# Altium PCB Lights Board.PcbDoc
Units mil, origin at the board's own origin, x right, y up, seen from the top; angles counter-clockwise.
Board outline 2505.86 x 2897.16 mil, 2 copper layers (Top Layer, Bottom Layer); 49 components, 47 nets, 247 pads, 28 vias.
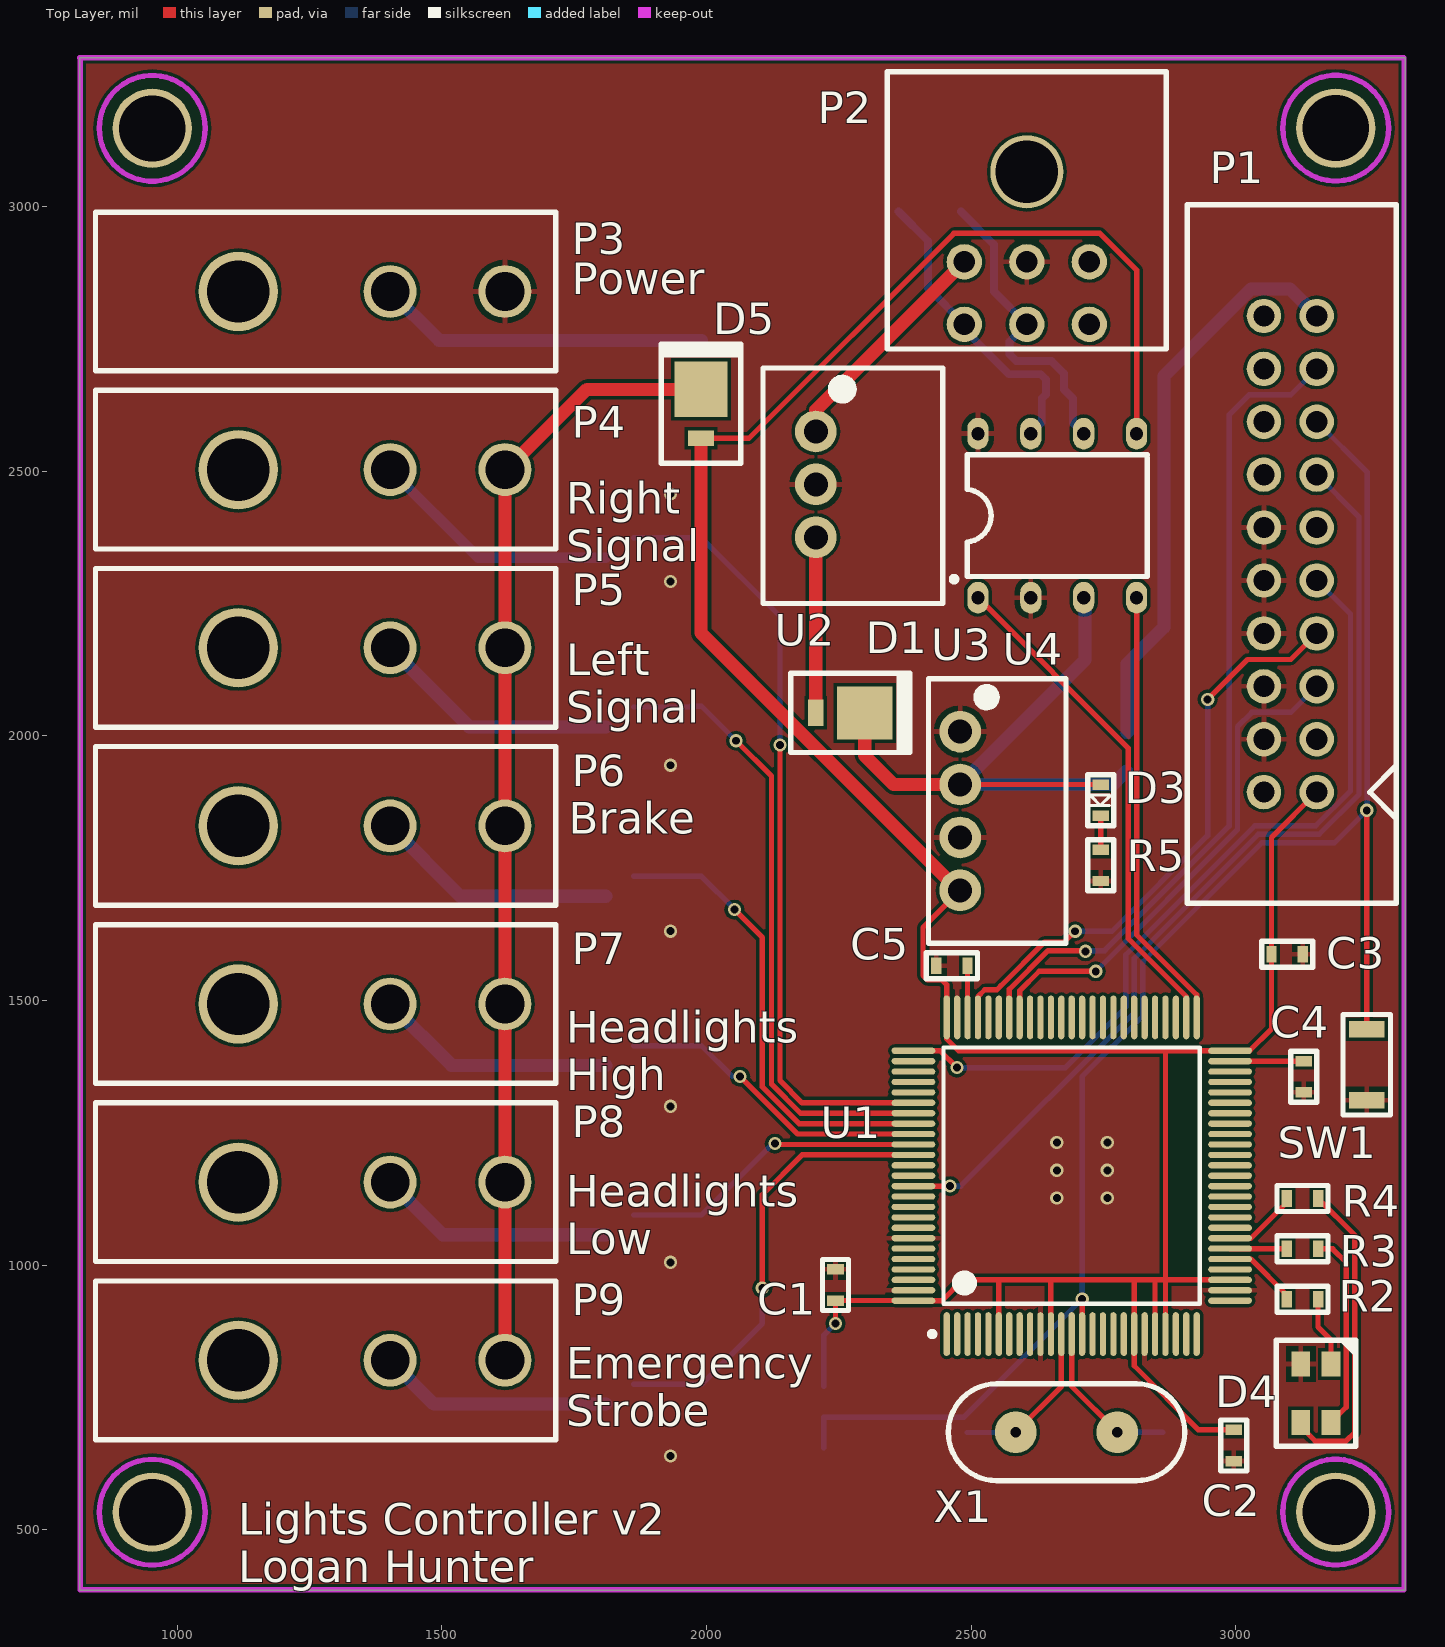
[diagram p0: Top Layer view]
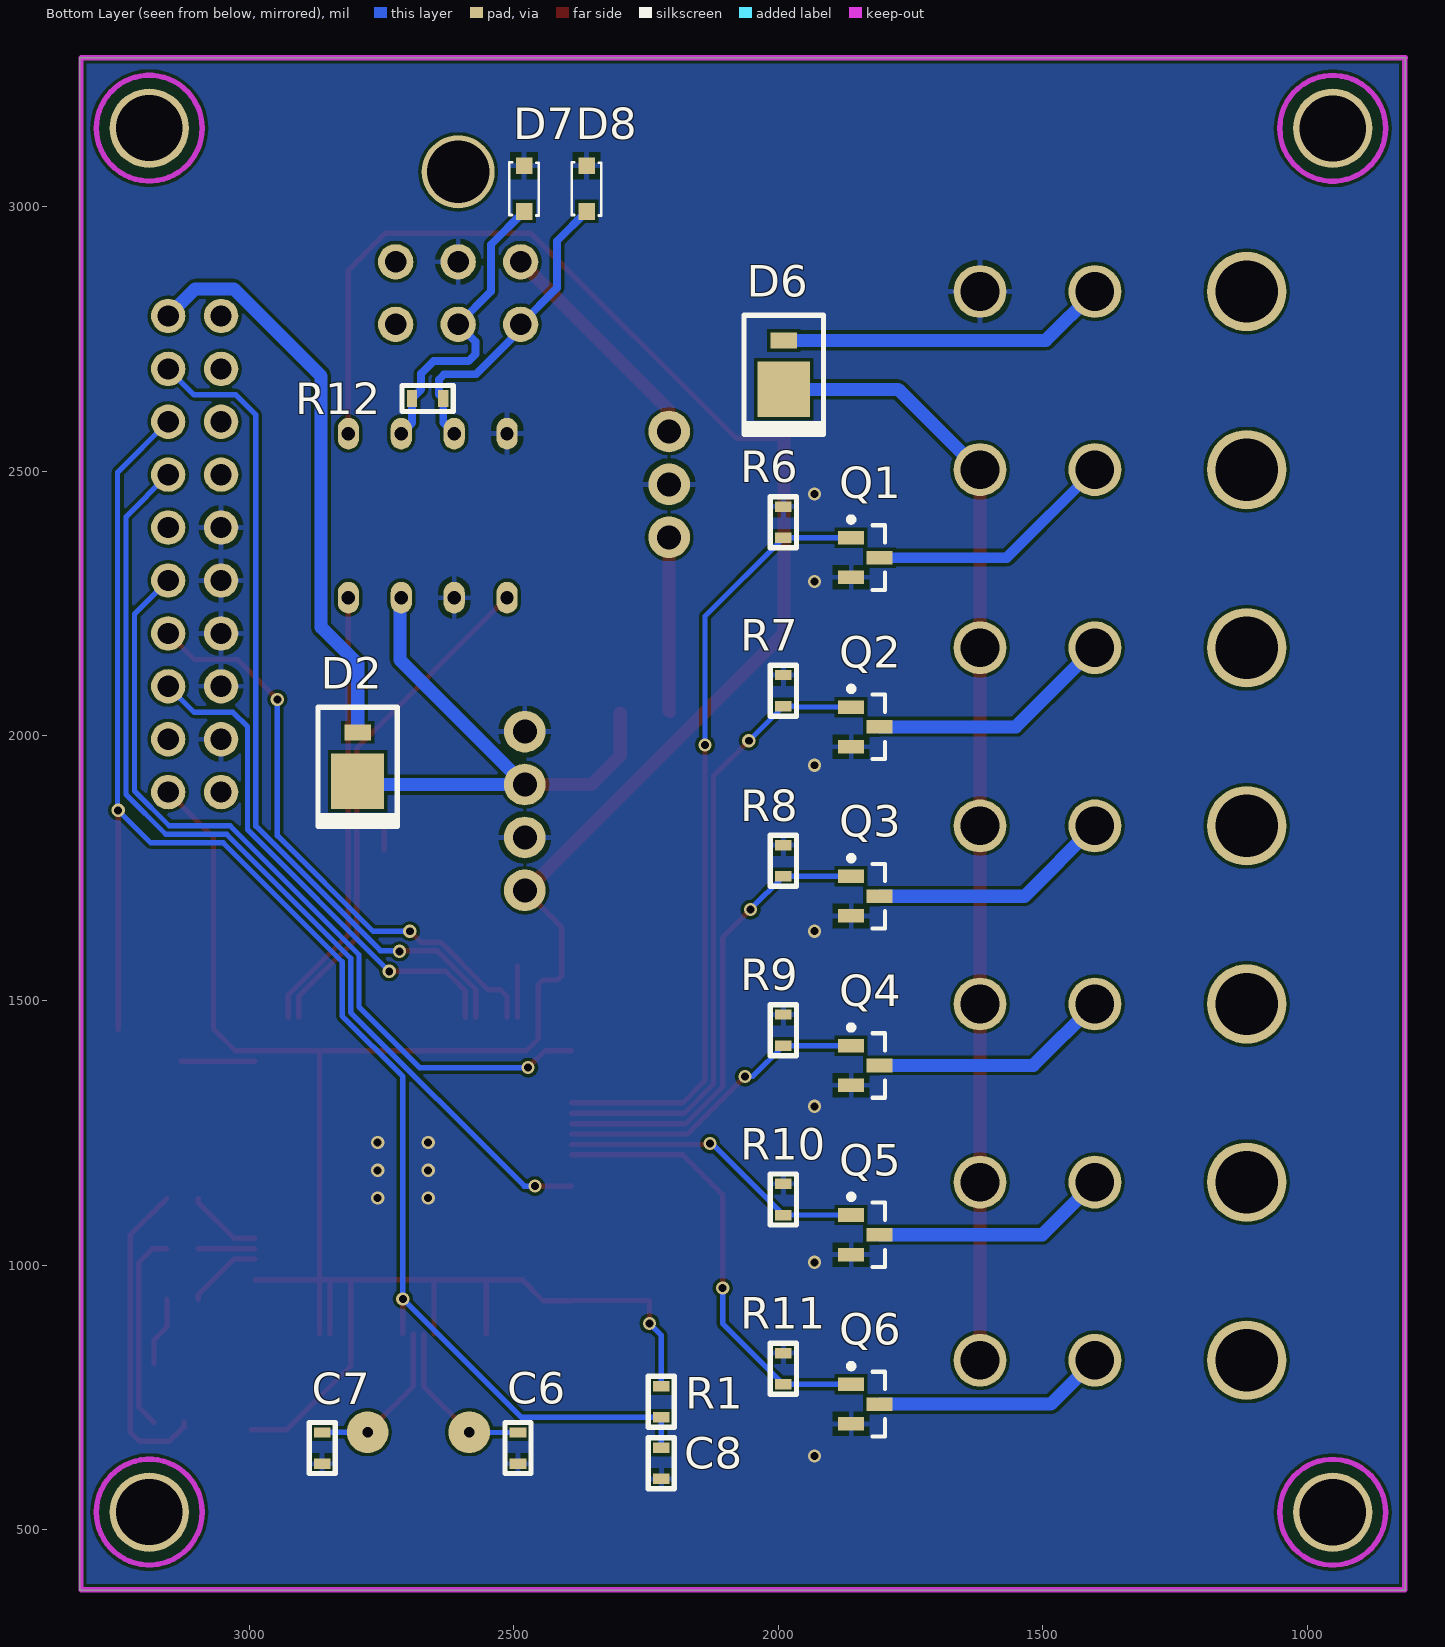
[diagram p1: Bottom Layer view, seen from below]

## Layer stack, top to bottom
Top Solder: solder mask 0.4, Solder Resist, Dk 3.5
Top Layer: signal copper 1.4
Dielectric 1: dielectric 12.6, FR-4, Dk 4.8
Bottom Layer: signal copper 1.4
Bottom Solder: solder mask 0.4, Solder Resist, Dk 3.5

## Board outline
815,385 3320.86,385 3320.86,3282.16 815,3282.16

## Design rules (kind name [scope] priority, off if disabled: settings)
Clearance [All] p1: gap=6 ignorepadtopadclearanceinfootprint=FALSE except(0: Arc-Hole Track-Hole SMDPad-Hole THPad-Hole Via-Hole Fill-Hole Poly-Hole Region-Hole Text-Hole)
DiffPairsRouting [All] p1: maxlimit=10 minlimit=10 mostfreqgap=10 toplayer_minwidth=15 toplayer_maxwidth=15 toplayer_prefwidth=15 bottomlayer_minwidth=15 bottomlayer_maxwidth=15 bottomlayer_prefwidth=15 maxuncoupledlength=500
HoleSize [All] p1: absolutevalues=TRUE maxlimit=200 minlimit=6 maxpercent=80.000 minpercent=20.000
MinimumSolderMaskSliver [All] p1: minsoldermaskwidth=1
PolygonConnect GroundVia [IsVia and InNet('GND')] p1: connectstyle=Direct reliefconductorwidth=10 reliefentries=4 polygonreliefangle="90 Angle" airgapwidth=10
PolygonConnect PolygonConnect_1 [All] p2: connectstyle=Relief reliefconductorwidth=10 reliefentries=4 polygonreliefangle="90 Angle" airgapwidth=10
RoutingVias [All] p1: holewidth=20 width=30 viastyle="Through Hole" minholewidth=12 minwidth=20 maxholewidth=70 maxwidth=100
SilkToSilkClearance [All] p1: silktosilkclearance=3
SilkToSolderMaskClearance [IsPad] p1: minsilkscreentomaskgap=2 clearancetoexposedcopper=TRUE
SolderMaskExpansion [All] p1: expansion=4
Width [All] p1: maxlimit=30 minlimit=5 preferedwidth=10
25 further rules are at their usual default settings.

## Classes and differential pairs
component class Power: C1 C2 C3 D1 D2 D3 R5 U3
component class Other: Q1 Q2 Q3 Q4 Q5 Q6 R6 R7 R8 R9 R10 R11 R12 U4
component class MCU: C4 C5 C6 C7 C8 D4 R1 R2 R3 R4 SW1 U1 X1
component class Connectors: D5 D6 D7 D8 P1 P2 P3 P4 P5 P6 P7 P8 P9
differential pair CAN2: +CAN2_P -CAN2_N

## Components (designator, comment, footprint, x,y, rotation, side; value= is the part's Value field where it differs from the comment)
C1 "SCH_GENERIC_CAPACITOR_0603" PCB_GENERIC_SMD_0603 2243.7,962.31 r270 top
C2 "SCH_GENERIC_CAPACITOR_0603" PCB_GENERIC_SMD_0603 2996.48,659 r90 top
C3 "SCH_GENERIC_CAPACITOR_0603" PCB_GENERIC_SMD_0603 3097.36,1587.36 r180 top
C4 "SCH_GENERIC_CAPACITOR_0603" PCB_GENERIC_SMD_0603 3128.89,1356.01 r90 top
C5 "SCH_GENERIC_CAPACITOR_0603" PCB_GENERIC_SMD_0603 2463.75,1565.57 r0 top
C6 "SCH_GENERIC_CAPACITOR_0603" PCB_GENERIC_SMD_0603 2492.2,654.04 r90 bottom
C7 "SCH_GENERIC_CAPACITOR_0603" PCB_GENERIC_SMD_0603 2862.42,654.04 r90 bottom
C8 "SCH_GENERIC_CAPACITOR_0603" PCB_GENERIC_SMD_0603 2221.26,625.21 r270 bottom
D1 "Schottky Diode" "ON Semi Schottky Diode - MBRM110LT1G" 2233.99,2043.6 r180 top
D2 "Schottky Diode" "ON Semi Schottky Diode - MBRM110LT1G" 2795.26,1979.31 r90 bottom
D3 "Red LED" SMD_0603_LED 2746.84,1878.62 r270 top
D4 "TriColourLED" "TricolourLED - SunLED - DK  1497-1225-2-ND" 3151.79,757.73 r90 top
D5 "Schottky Diode" "ON Semi Schottky Diode - MBRM110LT1G" 1989.56,2590.17 r270 top
D6 "Schottky Diode" "ON Semi Schottky Diode - MBRM110LT1G" 1990,2720 r90 bottom
D7 "TVS Diode" "TVS Diode" 2480.69,3034.61 r0 bottom
D8 "TVS Diode" "TVS Diode" 2362.58,3034.61 r0 bottom
P1 "SWD/VCOM Header" "Samtec TST-110-01-G-D" 3153.4,2793.8 r270 top
P2 "SCH_MLX_MICROFIT_3X2" PCB_MLX_MICROFIT_3X2 2605.34,3066.19 r180 top
P3 "Molex Mini-Fit 1x2" "Molex Mini-Fit Jr 2x1" 1115,2840 r270 top
P4 "Molex Mini-Fit 1x2" "Molex Mini-Fit Jr 2x1" 1115,2503.33 r270 top
P5 "Molex Mini-Fit 1x2" "Molex Mini-Fit Jr 2x1" 1115,2166.67 r270 top
P6 "Molex Mini-Fit 1x2" "Molex Mini-Fit Jr 2x1" 1115,1830 r270 top
P7 "Molex Mini-Fit 1x2" "Molex Mini-Fit Jr 2x1" 1115,1493.33 r270 top
P8 "Molex Mini-Fit 1x2" "Molex Mini-Fit Jr 2x1" 1115,1156.67 r270 top
P9 "Molex Mini-Fit 1x2" "Molex Mini-Fit Jr 2x1" 1115,820 r270 top
Q1 "NMOS" "NMOS - SSM3K333R - SOTFL95P180X88-3M" 1835.9,2337.16 r180 bottom
Q2 "NMOS" "NMOS - SSM3K333R - SOTFL95P180X88-3M" 1835.9,2017.16 r180 bottom
Q3 "NMOS" "NMOS - SSM3K333R - SOTFL95P180X88-3M" 1835.9,1697.16 r180 bottom
Q4 "NMOS" "NMOS - SSM3K333R - SOTFL95P180X88-3M" 1835.9,1377.16 r180 bottom
Q5 "NMOS" "NMOS - SSM3K333R - SOTFL95P180X88-3M" 1835.9,1057.16 r180 bottom
Q6 "NMOS" "NMOS - SSM3K333R - SOTFL95P180X88-3M" 1835.9,737.16 r180 bottom
R1 "SCH_GENERIC_RESISTOR_0603" PCB_GENERIC_SMD_0603 2221.26,741.57 r90 bottom
R2 "SCH_GENERIC_RESISTOR_0603" PCB_GENERIC_SMD_0603 3126.24,935.32 r0 top
R3 "SCH_GENERIC_RESISTOR_0603" PCB_GENERIC_SMD_0603 3126.24,1030.6 r0 top
R4 "SCH_GENERIC_RESISTOR_0603" PCB_GENERIC_SMD_0603 3126.24,1125.89 r0 top
R5 "SCH_GENERIC_RESISTOR_0603" PCB_GENERIC_SMD_0603 2744.99,1755.42 r270 top
R6 "SCH_GENERIC_RESISTOR_0603" PCB_GENERIC_SMD_0603 1990.6,2404 r90 bottom
R7 "SCH_GENERIC_RESISTOR_0603" PCB_GENERIC_SMD_0603 1990.6,2085.61 r90 bottom
R8 "SCH_GENERIC_RESISTOR_0603" PCB_GENERIC_SMD_0603 1990.6,1764.11 r90 bottom
R9 "SCH_GENERIC_RESISTOR_0603" PCB_GENERIC_SMD_0603 1990.6,1443.93 r90 bottom
R10 "SCH_GENERIC_RESISTOR_0603" PCB_GENERIC_SMD_0603 1990.6,1124 r90 bottom
R11 "SCH_GENERIC_RESISTOR_0603" PCB_GENERIC_SMD_0603 1990.6,804.08 r90 bottom
R12 "SCH_GENERIC_RESISTOR_0603" PCB_GENERIC_SMD_0603 2663.06,2637.71 r180 bottom
SW1 "Reset Switch" "Push Button Switch" 3247.85,1378.53 r270 top
U1 "STM32F407VGT6" STM-LQFP100_M 2690.2,1168.81 r90 top
U2 "R78E-1.0 DC/DC" R78-1.0 2206.59,2475.48 r270 top
U3 "RECOM RO Series" "RECOM RO Series 1W DCDC" 2479.36,2008.19 r270 top
U4 "MCP2562" MCP2562 2662.86,2416.38 r90 top
X1 "XTAL" CRYSTAL_8MHZ 2680.41,684.07 r0 top

## Footprints (in the part's own frame and the unit in brackets; to place one, negate y for a bottom-side part, rotate by r counter-clockwise, add the part's x,y. Pads: shape width x height; smd on the part's side, far side on the other; paste and mask are expansions set on the pad)
CRYSTAL_8MHZ [mm] "631-1100-ND"
  round 2 hole 0.5: 1(-2.44,0) 2(2.44,0)
  silkscreen extent -5.68,-2.32 5.68,2.32, body extent -5.59,-1.85 5.59,1.85, height 3.6
MCP2562 [mil]
  oval 60x40 hole 25: 1(-155,150) 2(-155,50) 3(-155,-50) 4(-155,-150) 5(155,-150) 6(155,-50) 7(155,50) 8(155,150)
  silkscreen extent -125,-170 115,200, body extent -115,-170 115,170, height 210
"Molex Mini-Fit Jr 2x1" [mil]
  round 100 hole 73: 1(0,287) 2(0,504)
  round 150 hole 118: ""(0,0)
  silkscreen extent -150,-270 150,600, body extent -111,-260 117,525, height 449
"NMOS - SSM3K333R - SOTFL95P180X88-3M" [mm] "SOTFL, 3-Leads, Body 2.90x1.80mm, Pitch 0.95mm, IPC Low Density"
  rect 1.25x0.65 smd: 1(-0.675,0.95) 2(-0.675,-0.95) 3(0.675,0)
  silkscreen extent -0.8,-1.55 0.95,1.95, body extent -0.95,-1.55 0.95,1.55, height 0.88
"ON Semi Schottky Diode - MBRM110LT1G" [mil]
  rect 105x100 smd: 1(-65,0)
  rect 30x50 smd: 2(27.5,0)
  silkscreen extent -150,-75 75,75, body extent -115,-65 0,65, height 40
PCB_GENERIC_SMD_0603 [mm]
  rect 0.5x0.8 smd: 1(-0.75,0) 2(0.75,0)
  silkscreen extent -1.22,-0.63 1.22,0.63, body extent -0.75,-0.5 0.75,0.5, height 0.45
PCB_MLX_MICROFIT_3X2 [mm]
  round 1.7 hole 1.02: 1(3,4.32) 2(0,4.32) 3(-3,4.32) 4(3,7.32) 5(0,7.32) 6(-3,7.32)
  round 3.5 hole 3: ""(0,0)
  silkscreen extent -6.7,-4.8 6.7,8.5, body extent -6.57,-4.65 6.58,7.59, height 8.83
"Push Button Switch" [mm]
  rect 0.8x1.7 smd: 1(-1.7,0) 2(1.7,0)
  silkscreen extent -2.41,-1.14 2.41,1.14, body extent -2.16,-0.89 2.16,0.89, height 1.6
R78-1.0 [mm]
  round 2 hole 1.15: 1(-2.54,0) 2(0,0) 3(2.54,0)
  silkscreen extent -5.59,-2.54 5.72,6.1, body extent -4.44,-1.59 4.45,5.4, height 10.4
"RECOM RO Series 1W DCDC" [mm] "RO-053.3S"
  round 2 hole 1.15: 1(0,0) 2(2.54,0) 3(5.08,0) 4(7.62,0)
  silkscreen extent -2.54,-1.52 10.16,5.08, body extent -2.41,-1.4 10.03,4.95, height 10
"Samtec TST-110-01-G-D" [mil] "TST-110-01-G-D"
  round 65 hole 40: 1(900,0) 2(900,-100) 3(800,0) 4(800,-100) 5(700,0) 6(700,-100) 7(600,0) 8(600,-100) 9(500,0) 10(500,-100) 11(400,0) 12(400,-100) 13(300,0) 14(300,-100) 15(200,0) 16(200,-100) 17(100,0) 18(100,-100) 19(0,0) 20(0,-100)
  silkscreen extent -210,-245 1110,150, body extent -200,-233 1100,132, height 350
SMD_0603_LED [mm]
  rect 0.5x0.8 smd: 1(-0.747,-0.047) 2(0.753,-0.047)
  silkscreen extent -1.22,-0.67 1.23,0.58, body extent -0.75,-0.55 0.75,0.45, height 0.45
STM-LQFP100_M [mm] "Thin QFP, 100-Leads, Body 14x14mm, Pitch 0.5mm, IPC Low Density"
  oval 2.1x0.3 smd: 1(-7.6,6) 2(-7.6,5.5) 3(-7.6,5) 4(-7.6,4.5) 5(-7.6,4) 6(-7.6,3.5) 7(-7.6,3) 8(-7.6,2.5) 9(-7.6,2) 10(-7.6,1.5) 11(-7.6,1) 12(-7.6,0.5) 13(-7.6,0) 14(-7.6,-0.5) 15(-7.6,-1) 16(-7.6,-1.5) 17(-7.6,-2) 18(-7.6,-2.5) 19(-7.6,-3) 20(-7.6,-3.5) 21(-7.6,-4) 22(-7.6,-4.5) 23(-7.6,-5) 24(-7.6,-5.5) 25(-7.6,-6) 51(7.6,-6) 52(7.6,-5.5) 53(7.6,-5) 54(7.6,-4.5) 55(7.6,-4) 56(7.6,-3.5) 57(7.6,-3) 58(7.6,-2.5) 59(7.6,-2) 60(7.6,-1.5) 61(7.6,-1) 62(7.6,-0.5) 63(7.6,0) 64(7.6,0.5) 65(7.6,1) 66(7.6,1.5) 67(7.6,2) 68(7.6,2.5) 69(7.6,3) 70(7.6,3.5) 71(7.6,4) 72(7.6,4.5) 73(7.6,5) 74(7.6,5.5) 75(7.6,6)
  oval 0.3x2.1 smd: 26(-6,-7.6) 27(-5.5,-7.6) 28(-5,-7.6) 29(-4.5,-7.6) 30(-4,-7.6) 31(-3.5,-7.6) 32(-3,-7.6) 33(-2.5,-7.6) 34(-2,-7.6) 35(-1.5,-7.6) 36(-1,-7.6) 37(-0.5,-7.6) 38(0,-7.6) 39(0.5,-7.6) 40(1,-7.6) 41(1.5,-7.6) 42(2,-7.6) 43(2.5,-7.6) 44(3,-7.6) 45(3.5,-7.6) 46(4,-7.6) 47(4.5,-7.6) 48(5,-7.6) 49(5.5,-7.6) 50(6,-7.6) 76(6,7.6) 77(5.5,7.6) 78(5,7.6) 79(4.5,7.6) 80(4,7.6) 81(3.5,7.6) 82(3,7.6) 83(2.5,7.6) 84(2,7.6) 85(1.5,7.6) 86(1,7.6) 87(0.5,7.6) 88(0,7.6) 89(-0.5,7.6) 90(-1,7.6) 91(-1.5,7.6) 92(-2,7.6) 93(-2.5,7.6) 94(-3,7.6) 95(-3.5,7.6) 96(-4,7.6) 97(-4.5,7.6) 98(-5,7.6) 99(-5.5,7.6) 100(-6,7.6)
  silkscreen extent -7.72,-6.15 6.15,6.82, body extent -7,-7 7,7, height 1.6
"TricolourLED - SunLED - DK  1497-1225-2-ND" [mm]
  rect 1.2x0.9 smd: 1(1.4,-0.725) 2(-1.4,-0.725) 3(-1.4,0.725) 4(1.4,0.725)
  silkscreen extent -2.54,-1.91 2.54,1.91, body extent -1.84,-1.52 1.84,1.52, height 1.9
"TVS Diode" [mm]
  rect 0.8x0.8 smd: 1(0,1.1) 2(0,-1.1)
  silkscreen extent -0.71,-1.27 0.71,1.3, body extent -0.65,-1.27 0.65,1.27, height 1.04

## Part data
C1: "Generic SMD capacitor 0603", Capacitance=0.33uF
C2 C3: "Generic SMD capacitor 0603", Capacitance=0.33uF, Tolerance=*%
C4 C5: "Generic SMD capacitor 0603", Capacitance=2.2uF, Tolerance=*%
C6 C7: "Generic SMD capacitor 0603", Capacitance=30pF, Tolerance=*%
C8: "Generic SMD capacitor 0603", Capacitance=100nF, Tolerance=*%
D1 D2 D5 D6: library part "ON Semi Schottky Diode - MBRM110LT1G"
D3: library part SMD_0603_LED
D7 D8: Manufacturer=Bourns, Manufacturer ID=CDSOD323-T03SC
Q1 Q2 Q3 Q4 Q5 Q6: library part "NMOS - SSM3K333R"
R1 R6 R7 R8 R9 R10 R11: "Generic SMD resistor 0603", Resistance=100K
R2: "Generic SMD resistor 0603", Resistance=56R
R3: "Generic SMD resistor 0603", Resistance=5.1R
R4: "Generic SMD resistor 0603", Resistance=0.1R
R5: "Generic SMD resistor 0603", Resistance=150R
R12: "Generic SMD resistor 0603", Resistance=120R
SW1: library part PushButtonSwitch
U1: "ARM Cortex-M4 32-bit MCU+FPU, 210 DMIPS, 1024 kB Flash, 192 kB Internal RAM, 82 I/Os, 100-pin LQFP, -40 to 85 degC, Tray", I/Os (High Current)=82, Manufacturer=STMicroelectronics, Operating Frequency(F) (Processor speed) (MHz)=168, Supplier Part Number 1=497-11605-ND, Supply Voltage(Vcc) max (V)=3.6, Supply Voltage(Vcc) min (V)=1.8, ComponentLink1Description="Manufacturer URL", ComponentLink1URL=http://www.st.com/web/en/home.html, ComponentLink2Description=Datasheet, ComponentLink2URL=http://www.st.com/st-web-ui/static/active/en/resource/technical/document/datasheet/DM00037051.pdf, ComponentLink3Description="Package Specification", ComponentLink3URL=http://www.st.com/st-web-ui/static/active/en/resource/technical/document/data_brief/DM00071938.pdf, Core="ARM Cortex-M4", D/A Converter=2x12-bit, DatasheetVersion="Rev. 4", FLASH Size (Prog) (kB)=1024, Internal RAM Size (kB)=192, Mounting Technology="Surface Mount", PackageDescription="100-Pin Low Profile Quad Flat Package, 14 x 14 mm Body, 0.5 mm Pitch", PackageReference=LQFP100, PackageVersion="Rev. 1, 06/2013", Packing=Tray, PartNumber=STM32F407VGT6, Supplier 1=Digi-Key, Supplier 2=Farnell, Supplier 3=Newark, Supplier 4=Mouser, Supplier Part Number 2=2064368, Supplier Part Number 3=73T2333, Supplier Part Number 4=511-STM32F407VGT6
U2: library part R78E-1.0
U3: library part "RECOM RO Series DCDC Converter"
X1: library part Crystal, Frequency=8MHz

## Free pads (board coordinates)
  round 150 hole 125: ""(952.38,532.76) ""(952.38,3148.45) ""(3189.15,533.05) ""(3189.15,3148.74)

## Via types
v1: diameter 25, hole 15, Top Layer to Bottom Layer, 28 vias

## Nets (pads, with @x,y where several pads share a name; then routed paths per layer and width w, separated by ;. In a path a pad name is that pad's centre, name@x,y a point inside that pad or via, vN(x,y) a via of type N, cw(c..) or ccw(c..) an arc to the next point about the centre after c; other vN are vias at no path point)
3V3: C1.2 C2.2 C3.2 D5.2 P1.1 R1.2 U1.6 U1.11 U1.19 U1.21 U1.22 U1.28 U1.50 U1.75 U1.100 U3.4 U4.5 | length 6022.1
  Top Layer w10: D5.2 2080.31,2562.67 2467.5,2949.87 2743.69,2949.87 2812.86,2880.71 U4.5 ; v1(2243.7,889.55) C1.2 U1.100@2390.8,932.78 ; U1.100 2444.69,932.59 2484.06,971.96 2552.63,971.96 ; U3.4 2409.26,1638.09 2409.26,1547.45 2417.89,1538.82 2444.7,1538.82 2453.98,1529.54 U1.75 2453.98,1427.44 2476.39,1405.03 2866.02,1405.03 ; U1.6 2552.41,971.74 2552.63,971.96 ; U1.11 2650.83,971.12 ; 2808.31,970.68 U1.19 2808.31,809.75 2929.53,688.53 C2.2 ; U1.21 2847.68,971.29 ; U1.22 2867.37,971.96 ; U1.28 2867.37,971.96 ; P1.1 3067.83,1808.24 C3.2 3067.83,1446.3 3026.56,1405.03 U1.50 2866.02,1405.03 ; 2552.63,971.96 2867.37,971.96 ; 2866.02,1405.03 2867.37,1403.69 2867.37,971.96
  Top Layer w25: D5.2 1989.56,2194.37 2475.74,1708.19 U3.4
  Bottom Layer w10: R1.2 2221.26,867.1 v1(2243.7,889.55)
5V: D1.1 D2.1 D3.1 U3.2 U4.3 | length 1326.1
  Top Layer w10: U3.2 2744.83,1908.19 D3.1
  Top Layer w25: D1.1 2298.99,1962.87 2353.68,1908.19 U3.2
  Bottom Layer w25: U4.3 2715.34,2258.89 2715.34,2144.17 U3.2 2768.22,1908.19 D2.1@2793.56,1933.53
"5V - DCDC": D1.2 U2.3 | length 332.8
  Top Layer w20: D1.2@2203.46,2043.97 D1.2@2206.59,2047.1
  Top Layer w25: D1.2@2206.59,2047.1 U2.3
"5V - DEBUG": D2.2 P1.19 | length 1080.3
  Bottom Layer w25: D2.2 2795.26,2136.35 2864.52,2205.61 2864.52,2680.22 3029.11,2844.8 3102.4,2844.8 P1.19
12V: P2.1 U2.1 | length 436.9
  Top Layer w25: U2.1 2206.59,2615.47 P2.1
"12V - POWER": D6.2 P3.1 | length 626.3
  Bottom Layer w25: P3.1 1494.5,2747.5 D6.2
BE: Q3.1 R8.1 U1.83 | length 887.9
  Top Layer w10: v1(2052.61,1671.81) 2105.44,1618.98 2105.44,1336.66 2174.86,1267.24 U1.83
  Bottom Layer w10: Q3.1 1969.83,1734.56 ; 1969.85,1734.58 R8.1 2052.61,1672.57 v1(2052.61,1671.81)
BLUE_LED: R4.1 U1.32 | length 142.9
  Top Layer w10: U1.32 3029.07,1050.7 3096.71,1118.35 R4.1
BRAKE: P6.1 Q3.3 | length 462.4
  Bottom Layer w25: P6.1 1534.84,1697.16 Q3.3
CAN2_N: D7.1 P2.5 R12.1 U4.6 | length 582
  Bottom Layer w15: D7.1 2543.53,2928.47 2543.53,2839.81 P2.5 2572.59,2745.25 2572.59,2721.44 2585.38,2708.65 2651.64,2708.65 2675.56,2684.72 2675.56,2654.74 R12.1 2692.59,2591.65 U4.6
CAN2_P: D8.1 P2.4 R12.2 U4.7 | length 582.3
  Bottom Layer w15: D8.1 2418.82,2935.07 2418.82,2846.41 P2.4 2487.23,2768.14 2571.73,2683.65 2631.7,2683.65 2641.28,2674.07 2641.28,2645.46 R12.2 2633.53,2592.05 U4.7
CAN2_RX: U1.51 U4.4 | length 840.4
  Top Layer w10: U4.4 2812.86,1624.19 2926.42,1510.62 U1.51
CAN2_TX: U1.52 U4.1 | length 956.5
  Top Layer w10: U4.1 2796.86,1977.38 2796.86,1617.56 2906.74,1507.68 U1.52
"EMERGENCY STROBE": P9.1 Q6.3 | length 441.6
  Bottom Layer w25: P9.1 1484.84,737.16 Q6.3
ES: Q6.1 R11.1 U1.86 | length 850.8
  Top Layer w10: v1(2105.44,956.51) 2105.44,1132.88 2180.75,1208.18 U1.86
  Bottom Layer w10: Q6.1 1969.84,774.56 R11.1 2105.44,889.4 v1(2105.44,956.51)
GND: C1.1 C2.1 C3.1 C4.1 C5.1 C6.1 C7.1 C8.2 D4.4 D7.2 D8.2 P1.4 P1.6 P1.8 P1.10 P1.12 P2.2 P3.2 Q1.2 Q2.2 Q3.2 Q4.2 Q5.2 Q6.2 R5.2 R6.2 R7.2 R8.2 R9.2 R10.2 R11.2 SW1.2 U1.10 U1.20 U1.27 U1.74 U1.94 U1.99 U2.2 U3.1 U3.3 U4.2 U4.8
  other v1: 1931.75,639.09 1931.75,1005.09 2662.03,1126.63 2757.46,1126.63 2662.03,1179 2757.46,1179 2662.03,1231.36 2757.46,1231.36 1931.75,1300 1931.75,1631.03 1931.75,1944.58 1931.75,2291.94 1931.75,2457.45
GREEN_LED: R3.1 U1.31 | length 106.9
  Top Layer w10: U1.31 R3.1@3096.3,1031.02
"HEADLIGHTS (HIGH)": P7.1 Q4.3 | length 455.4
  Bottom Layer w25: P7.1 1518.17,1377.16 Q4.3
"HEADLIGHTS (LOW)": P8.1 Q5.3 | length 448.5
  Bottom Layer w25: P8.1 1501.51,1057.16 Q5.3
HHE: Q4.1 R9.1 U1.84 | length 597.7
  Top Layer w10: v1(2063.28,1356.19) 2171.92,1247.55 U1.84
  Bottom Layer w10: Q4.1 1969.69,1414.56 1969.85,1414.4 R9.1 2048.81,1356.19 v1(2063.28,1356.19)
HLE: Q5.1 R10.1 U1.85 | length 584.3
  Top Layer w10: v1@2125.87,1227.87 U1.85
  Bottom Layer w10: Q5.1 1969.76,1094.56 1969.85,1094.48 R10.1 v1@2125.64,1229.52
  other v1: 2129.21,1229.52
"LEFT SIGNAL": P5.1 Q2.3 | length 469.3
  Bottom Layer w25: P5.1 1551.51,2017.16 Q2.3
LSE: Q2.1 R7.1 U1.82 | length 1188.6
  Top Layer w10: v1(2055.92,1990.98) 2122.77,1924.13 2122.77,1341.96 2177.81,1286.92 U1.82
  Bottom Layer w10: Q2.1 1968.33,2054.56 1969.85,2056.09 R7.1 v1@2055.7,1990.98
NetC4_2: C4.2 U1.49 | length 139.6
  Top Layer w10: U1.49 3128.7,1385.35 C4.2
NetC5_2: C5.2 U1.73 | length 97.5
  Top Layer w10: U1.73 C5.2@2493.35,1565.5
NetC7_2: C7.2 U1.13 X1.2 | length 307.4
  Top Layer w10: U1.13 2690.2,770.34 X1.2
  Bottom Layer w10: X1.2 2861.92,684.07 C7.2
NetD3_2: D3.2 R5.1 | length 64
  Top Layer w10: R5.1 D3.2
NetD4_1: D4.1 R2.2 | length 132.6
  Top Layer w10: R2.2 3155.77,882.95 3180.33,858.39 D4.1
NetD4_2: D4.2 R3.2 | length 378.1
  Top Layer w10: R3.2 3183.38,1030.6 3209.05,1004.94 3209.05,731.33 D4.2
NetD4_3: D4.3 R4.2 | length 599
  Top Layer w10: D4.3 3123.24,694.48 3150.58,667.13 3208.48,667.13 3225.05,683.7 3225.05,1056.61 R4.2
NetR13_2: 
NetR14_2: 
NRST: C8.1 P1.15 R1.1 SW1.1 U1.14 | length 3120.7
  Top Layer w10: U1.14 v1(2709.89,936.02) v1@2710.22,936.35 ; v1(3247.85,1859.5) SW1.1 SW1.1
  Bottom Layer w10: C8.1 R1.1 2485.91,712.04 v1(2709.89,936.02) 2709.89,1356.09 2824.55,1470.75 2824.55,1573.24 3049.5,1798.19 3186.61,1798.19 3249.03,1860.62 3249.03,2498.17 P1.15
RED_LED: R2.1 U1.30 | length 143.7
  Top Layer w10: U1.30 3029.07,1011.33 3096.71,943.69 R2.1
"RIGHT SIGNAL": P4.1 Q1.3 | length 476.2
  Bottom Layer w20: P4.1 1568.17,2337.16 Q1.3
RSE: Q1.1 R6.1 U1.81 | length 1485
  Top Layer w10: v1(2138.77,1982.97) 2138.77,1348.59 2180.75,1306.61 U1.81
  Bottom Layer w10: Q1.1 1892.09,2374.56 1892.17,2374.47 R6.1 2138.77,2226.31 v1(2138.77,1982.97)
SCLK: C6.2 U1.12 X1.1 | length 312.9
  Top Layer w10: X1.1 2670.52,770.24 U1.12
  Bottom Layer w10: C6.2 X1.1@2583.85,683.57
SWCLK: P1.9 U1.76 | length 1538
  Top Layer w10: U1.76 2441.24,1405.03 v1(2473.14,1373.13)
  Bottom Layer w10: v1(2473.14,1373.13) 2678.12,1373.13 2792.55,1487.57 2792.55,1586.5 3036.25,1830.19 3151.3,1830.19 3217.03,1895.92 3217.03,2230.17 P1.9
SWDIO: P1.7 U1.72 | length 1115.2
  Top Layer w10: U1.72 2513.04,1507.68 2525.72,1520.36 2549.07,1520.36 2556.09,1527.38 2556.09,1527.71 2638.57,1610.19 2676.04,1610.19 v1(2696.67,1630.82) ; v1(2947.13,2069.06) 3022.68,2144.61 3104.2,2144.61 P1.7
  Bottom Layer w10: v1(2696.67,1630.82) 2766.39,1630.82 2947.13,1811.56 v1(2947.13,2069.06)
SWO: P1.13 U1.89 | length 1846.2
  Top Layer w10: U1.89 v1(2460.26,1149.13)
  Bottom Layer w10: v1(2460.26,1149.13) 2480.3,1149.13 2808.55,1477.38 2808.55,1579.87 3042.88,1814.19 3157.93,1814.19 3233.03,1889.29 3233.03,2414.17 P1.13
UART1_RX: P1.17 U1.69 | length 1575.5
  Top Layer w10: U1.69 2572.09,1521.09 2645.2,1594.19 v1@2714.67,1594.19
  Bottom Layer w10: v1@2714.67,1594.19 2752.38,1594.19 2987.67,1829.47 2987.67,2606.81 3025.51,2644.66 3104.25,2644.66 P1.17
  other v1: 2716.13,1593
UART1_TX: P1.5 U1.68 | length 964.2
  Top Layer w10: U1.68 2591.78,1518.14 2628.82,1555.19 v1(2735.59,1555.19)
  Bottom Layer w10: v1(2735.59,1555.19) 2736.01,1555.19 3003.67,1822.84 3003.67,2017.54 3030.72,2044.59 3104.18,2044.59 P1.5
"VARIABLE OUTPUT VOLTAGE": D5.1 D6.1 P4.2 P5.2 P6.2 P7.2 P8.2 P9.2 | length 2550.4
  Top Layer w25: P9.2 1619,1150 1619,1480 1619,1825 1619,2160 1619,2500 1774,2655 D5.1@1990,2655
  Bottom Layer w25: P4.2@1619,2500 1774,2655 D6.1
Y0: U1.1
Y1: U1.2
Y2: U1.3
Y3: U1.4
pads on no net: P1.2 P1.3 P1.11 P1.14 P1.16 P1.18 P1.20 P2. P2.3 P2.6 P3. P4. P5. P6. P7. P8. P9. U1.5 U1.7 U1.8 U1.9 U1.15 U1.16 U1.17 U1.18 U1.23 U1.24 U1.25 U1.26 U1.29 U1.33 U1.34 U1.35 U1.36 U1.37 U1.38 U1.39 U1.40 U1.41 U1.42 U1.43 U1.44 U1.45 U1.46 U1.47 U1.48 U1.53 U1.54 U1.55 U1.56 U1.57 U1.58 U1.59 U1.60 U1.61 U1.62 U1.63 U1.64 U1.65 U1.66 U1.67 U1.70 U1.71 U1.77 U1.78 U1.79 U1.80 U1.87 U1.88 U1.90 U1.91 U1.92 U1.93 U1.95 U1.96 U1.97 U1.98

## Polygon pours and split planes (outlines as drawn)
GND on Bottom Layer "GND_Bottom" (solid, remove dead copper, pour order 4): 820,3277.16 3320.86,3282.16 3320.86,385 815,385
GND on Top Layer "GND_Top" (solid, remove dead copper, pour order 6): 815,3282.16 3320.86,3282.16 3320.86,385 815,385

## Keep-outs
Keep-Out Layer:
  circle w10: c3189.15,533.05 r100
  circle w10: c952.38,532.76 r100
  circle w10: c3189.15,3148.74 r100
  circle w10: c952.38,3148.45 r100
  lines w10: 815.27,3282.02 816.37,3280.93 816.37,386.45 3318.24,386.45 3318.24,3282.02 815.27,3282.02

## Silkscreen, mask and mechanical layers (free items; w line width, h text height)
Top Overlay:
  text "Power" at 1745,2835 h60
  text "Right  / Signal" at 1735,2330 h60
  text "Left / Signal" at 1735,2025 h60
  text "Brake" at 1740,1815 h60
  text "Headlights / High" at 1735,1330 h60
  text "Headlights / Low" at 1735,1020 h60
  text "Emergency  / Strobe" at 1735,695 h60
  text "Lights Controller v2 / Logan Hunter" at 1114.67,400.28 h60